# EAGLE board bat-brd-rev00 (EAGLE 9.5.1)
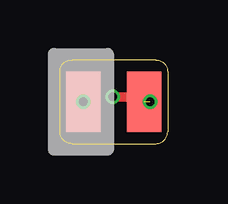
[diagram p0: board, top side]
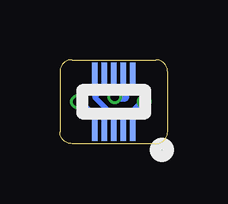
[diagram p1: board, bottom side, seen from below]

Size 4.5 x 3.5 mm. Coordinates in mm from the lower left corner, seen from the top.
Outline: 0.5,0 4,0 arc90 4.5,0.5 4.5,3 arc90 4,3.5 0.5,3.5 arc90 0,3 0,0.5 arc90 0.5,0
Copper layers (1*16): Top 0.035mm / dielectric 0.53mm / Bottom 0.035mm
Design rules "default": minimum track width 6mil, minimum drill 0.2mm, track to track 6mil, track to pad 6mil, pad to pad 6mil, via to via 6mil, smd to smd 6mil, copper to edge 40mil, drill to drill 6mil, minimum pad ring 10mil, minimum via ring 0.125mm, stop-mask expansion 4mil, vias tented up to drill 10000mil, thermal gap 10mil

## Footprints (pad centres in the part's own frame; a part is rotated, then mirrored left to right if it is on the bottom)
1X2_SMD = smd 1.448 x 2.54: 1 -1.27,0; 2 1.27,0
MEZ-DF37C-10DP = smd 0.23 x 1 bottom: P$1 -0.8,-1.14; P$2 -0.4,-1.14; P$3 0,-1.14; P$4 0.4,-1.14; P$5 0.8,-1.14; P$6 0.8,1.14; P$7 0.4,1.14; P$8 0,1.14; P$9 -0.4,1.14; P$10 -0.8,1.14

## Placement (x,y rotation side)
HEDR1  1X02SMD  [1X2_SMD]  2.25,1.75 0 top
U$1  CON-BAT-TG-MEZ_MALE  [MEZ-DF37C-10DP]  2.25,1.75 0 top

## Library data of the parts
HEDR1 U$1 = 0TG-Lib v01.5

## Nets
GND: HEDR1.2 U$1.P$4 U$1.P$5 U$1.P$9 U$1.P$10
VBAT: HEDR1.1 U$1.P$1 U$1.P$2 U$1.P$6 U$1.P$7

## Tracks (layer width: path | path; a pad name or v marks a point on that pad's centre or on a via)
GND  (via drill 0.35)  (1 unrouted)
  Top 0.2: 2.75,1.95 3.57,1.95 v3.77,1.75
  Top 0.4: v2.2,1.95 2.75,1.95 3.08,1.95
  Bottom 0.2: 3,1.25 2.85,1.25 2.65,1.05 U$1.P$4 | 3,1.25 3.12,1.25 | U$1.P$9 1.85,2.15 2.05,1.95 v2.2,1.95 | U$1.P$10 1.45,2.3 1.8,1.95 | v3.77,1.75 3.62,1.75 3.12,1.25 | U$1.P$5 3.05,1.18 | 3.05,1.18 3.12,1.25 | 3,1.25 3.05,1.2 3.05,1.18
  Bottom 0.4: v2.2,1.95 1.8,1.95
VBAT  (via drill 0.35)
  Bottom 0.2: U$1.P$1 1.45,1.28 | 1.45,1.28 1.38,1.35 2.45,1.35 3.05,1.95 U$1.P$6 3.05,2.11 2.97,2.03 2.65,2.35 U$1.P$7 | U$1.P$2 1.85,1.15 1.72,1.28 1.45,1.28
  Bottom 0.4: HEDR1.1 1.38,1.35
  other vias: 0.98,1.75